# Altium PCB POWER_SUPPLY_PAIRED.PcbDoc
Units mm, origin at the board's own origin, x right, y up, seen from the top; angles counter-clockwise.
Board outline 87 x 207 mm, 2 copper layers (Top Layer, Bottom Layer); 17 components, 12 nets, 50 pads, 0 vias.
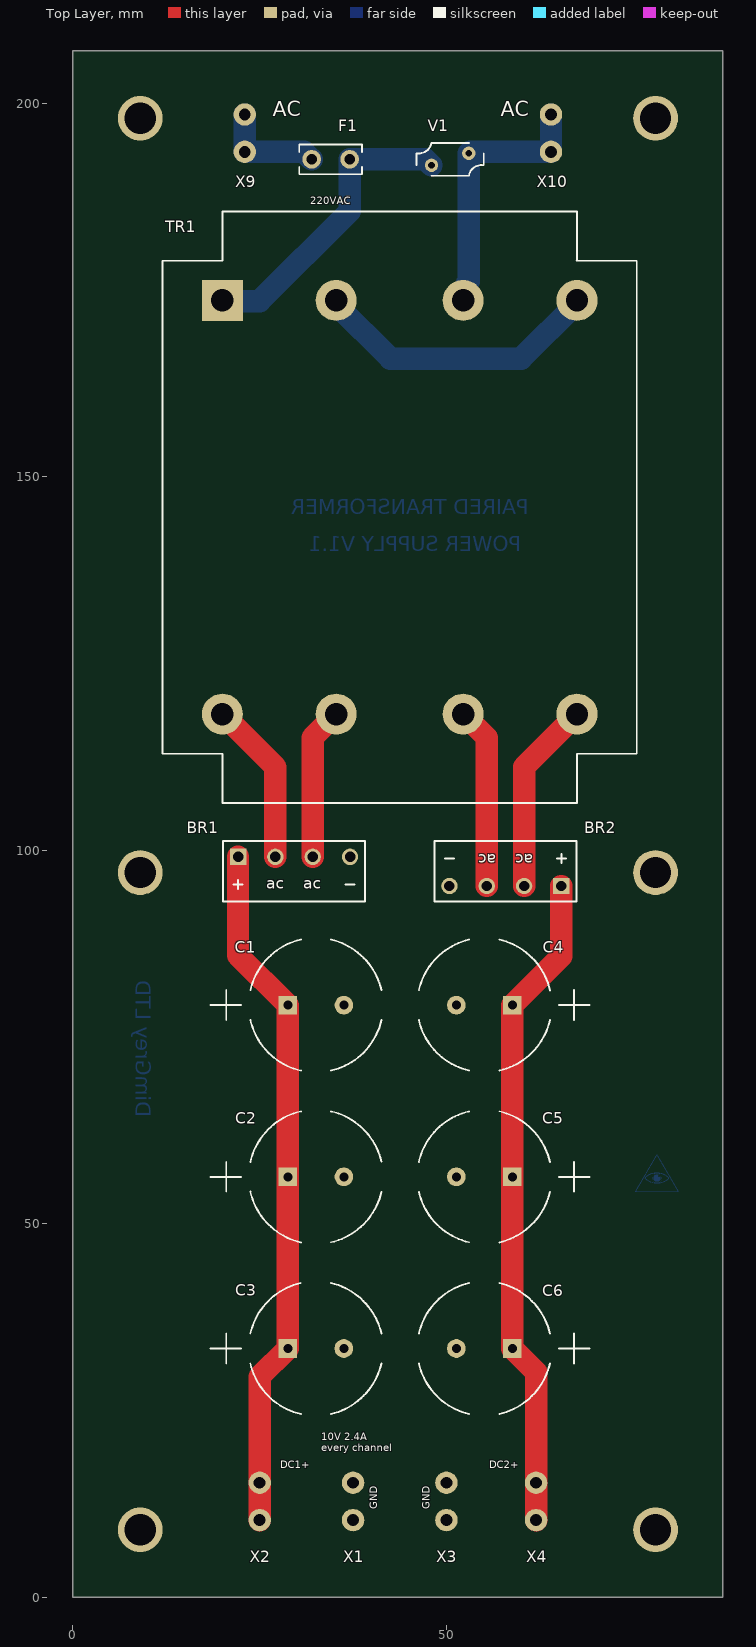
[diagram p0: Top Layer view]
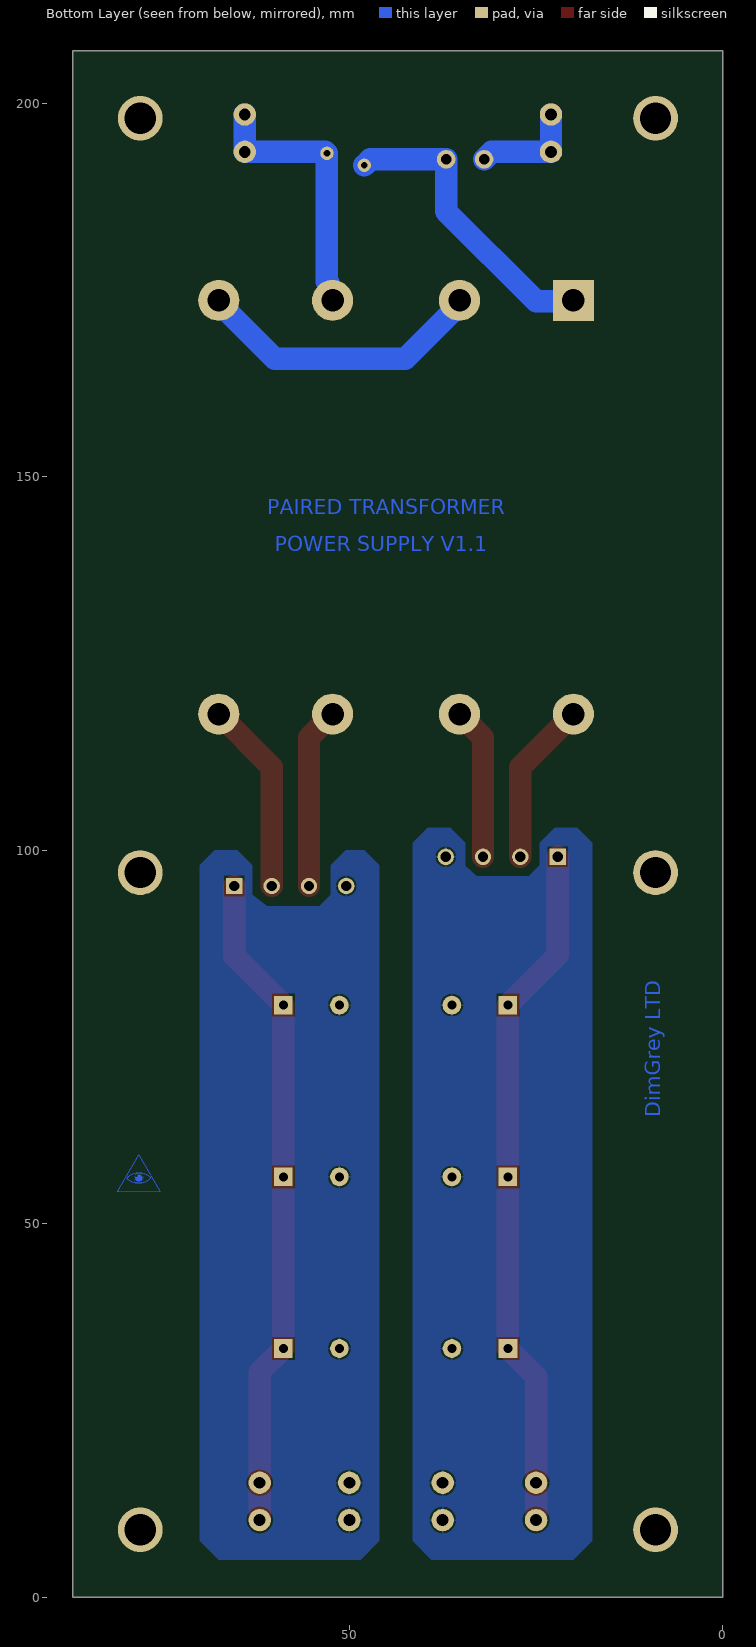
[diagram p1: Bottom Layer view, seen from below]

## Layer stack, top to bottom
Top Solder: solder mask 0.0102, Solder Resist, Dk 3.5
Top Layer: signal copper 0.0356
Dielectric 1: dielectric 0.32, FR-4, Dk 4.8
Bottom Layer: signal copper 0.0356
Bottom Solder: solder mask 0.0102, Solder Resist, Dk 3.5

## Board outline
0,0 87,0 87,207 0,207

## Design rules (kind name [scope] priority, off if disabled: settings)
Clearance [All] p1: gap=0.254 ignorepadtopadclearanceinfootprint=FALSE except(0: Arc-Hole Track-Hole SMDPad-Hole THPad-Hole Via-Hole Fill-Hole Poly-Hole Region-Hole Text-Hole)
PolygonConnect [All] p1: connectstyle=Relief reliefconductorwidth=0.254 reliefentries=4 polygonreliefangle="90 Angle" airgapwidth=0.254
RoutingVias [All] p1: holewidth=0.711 width=1.27 viastyle="Through Hole" minholewidth=0.711 minwidth=1.27 maxholewidth=0.711 maxwidth=1.27
SolderMaskExpansion [All] p1: expansion=0.102 istentingtop=FALSE
Width [All] p1: maxlimit=5 minlimit=2 preferedwidth=3
30 further rules are at their usual default settings.

## Components (designator, comment, footprint, x,y, rotation, side; value= is the part's Value field where it differs from the comment)
BR1 "KBL404G" THT_BRIGDE_KBL404G 29.6,99.1 r0 top
BR2 "KBL404G" THT_BRIGDE_KBL404G 57.9,95.2 r180 top
C1 "4700uF" THT_CAP_EL_SAMXON_EKM478M1HL40RRSAP 32.523,79.248 r0 top
C2 "4700uF" THT_CAP_EL_SAMXON_EKM478M1HL40RRSAP 32.523,56.261 r0 top
C3 "4700uF" THT_CAP_EL_SAMXON_EKM478M1HL40RRSAP 32.516,33.274 r0 top
C4 "4700uF" THT_CAP_EL_SAMXON_EKM478M1HL40RRSAP 55.08,79.248 r180 top
C5 "4700uF" THT_CAP_EL_SAMXON_EKM478M1HL40RRSAP 55.08,56.261 r180 top
C6 "4700uF" THT_CAP_EL_SAMXON_EKM478M1HL40RRSAP 55.08,33.274 r180 top
F1 "200mA" THT_FUSE-MICRO_MTS0200A 34.5,192.5 r0 top
TR1 "FP20-2400" THT_TRFMR_FP20-2400_TRIADMAG 43.74,145.909 r180 top
V1 "B72207S0271K101" THT_VAR_B72207S0271K101 50.5,192.5 r180 top
X1 "GND" THT_TERMINAL-PCB_L-KLS8-01128-PC-250 37.5,12.8 r90 top
X2 "DC1 +" THT_TERMINAL-PCB_L-KLS8-01128-PC-250 25,12.8 r90 top
X3 "GND" THT_TERMINAL-PCB_L-KLS8-01128-PC-250 50,12.8 r90 top
X4 "DC2 +" THT_TERMINAL-PCB_L-KLS8-01128-PC-250 62,12.8 r90 top
X9 "AC1" THT_TERMINAL-PCB_L-KLS8-01128-PC-250 23,196 r90 top
X10 "AC2" THT_TERMINAL-PCB_L-KLS8-01128-PC-250 64,196 r90 top

## Footprints (in the part's own frame and the unit in brackets; to place one, negate y for a bottom-side part, rotate by r counter-clockwise, add the part's x,y. Pads: shape width x height; smd on the part's side, far side on the other; paste and mask are expansions set on the pad)
THT_BRIGDE_KBL404G [mm] "THT Diode Bridge 400V 4A KBL404G TAIWAN SEMICONDUCTOR"
  rect 2.2x2.2 hole 1.4: 1(-7.5,0)
  round 2.2 hole 1.4: 2(-2.5,0) 3(2.5,0) 4(7.493,0)
  silkscreen extent -9.5,-6 9.5,2.1, body extent -9.5,-6 9.5,2.1, height 15.8
THT_CAP_EL_SAMXON_EKM478M1HL40RRSAP [mm] "THT Capacitor Electrolytic 50V 4700uF Pitch 7.5mm SAMXON EKM478M1HL40RRSAP"
  rect 2.5x2.5 hole 1.2: 1(-3.75,0)
  round 2.5 hole 1.2: 2(3.75,0)
  silkscreen extent -14.1,-8.78 8.78,8.77, body extent -9,-9 9,9, height 40
THT_FUSE-MICRO_MTS0200A [mm] "THT Fuse Slow Blow Micro Fuse, 250V/200mA REOMAX"
  round 2.5 hole 1.4: 1(-2.54,0) 2(2.54,0)
  silkscreen extent -4.2,-2 4.2,2, body extent -4.2,-2 4.2,2, height 8.2
THT_TERMINAL-PCB_L-KLS8-01128-PC-250 [mm] "THT Terminal Tab PCB L-KLS8-01128-PC-250 KLS ELECTRONIC"
  round 3 hole 1.6: 1(-2.5,0) 1(2.5,0)
  body extent -4.1,-0.5 4.1,0.5, height 8
THT_TRFMR_FP20-2400_TRIADMAG [mm] "THT Power Transformer 48VA Secondary=2.4A  Primary=230 VAC Secondary=20V FP20-2400 TRIAD MAGNETICS"
  rect 5.5x5.5 hole 3: 1(23.74,-27.7)
  round 5.5 hole 3: 2(8.5,-27.7) 3(-8.5,-27.7) 4(-23.74,-27.7) 5(23.74,27.7) 6(8.5,27.7) 7(-8.5,27.7) 8(-23.74,27.7)
  silkscreen extent -31.75,-39.6 31.75,39.6, body extent -31.75,-39.6 31.75,39.6, height 27
THT_VAR_B72207S0271K101 [mm] "THT Varistor 275V 1200A B72207S0271K101 EPCOS(TDK)"
  round 1.8 hole 0.9: 1(-2.5,-0.8) 2(2.5,0.8)
  silkscreen extent -4.5,-2.2 4.5,2.2, body extent -4.5,-2.2 4.5,2.2, height 9.5

## Part data
BR1 BR2: library part THT_BRIGDE_KBL404G, "THT Diode Bridge 400V 4A KBL404G TAIWAN SEMICONDUCTOR"
C1 C2 C3 C4 C5 C6: library part THT_CAP_EL_SAMXON_EKM478M1HL40RRSAP, "THT Capacitor Electrolytic 50V 4700uF Pitch 7.5mm SAMXON EKM478M1HL40RRSAP"
F1: library part THT_FUSE-MICRO_MTS0200A, "THT Fuse Slow Blow Micro Fuse, 250V/200mA REOMAX"
TR1: library part THT_TRFMR_FP20-2400_TRIADMAG, "THT Power Transformer 48VA Secondary=2.4A  Primary=230 VAC Secondary=20V FP20-2400 TRIAD MAGNETICS"
V1: library part THT_VAR_B72207S0271K101, "THT Varistor 275V 1200A B72207S0271K101 EPCOS(TDK)"
X1 X2 X3 X4 X9 X10: library part THT_TERMINAL-PCB_L-KLS8-01128-PC-250, "THT Terminal Tab PCB L-KLS8-01128-PC-250 KLS ELECTRONIC"

## Free pads (board coordinates)
  round 6 hole 4.2: ""(9,9) ""(9,97) ""(9,198) ""(78,9) ""(78,97) ""(78,198)

## Nets (pads, with @x,y where several pads share a name; then routed paths per layer and width w, separated by ;. In a path a pad name is that pad's centre, name@x,y a point inside that pad or via, vN(x,y) a via of type N, cw(c..) or ccw(c..) an arc to the next point about the centre after c; other vN are vias at no path point)
GND1: BR1.4 C1.2 C2.2 C3.2 X1.1
GND2: BR2.4 C4.2 C5.2 C6.2 X3.1
NetBR1_1: BR1.1 C1.1 C2.1 C3.1 X2.1 | length 93.1
  Top Layer w3: BR1.1 22.1,85.921 C1.1 C2.1 28.77,56.257 28.77,33.278 C3.1 25,29.508 25,15.3 X2.1@25,10.3
NetBR1_2: BR1.2 TR1.5 | length 22
  Top Layer w3: TR1.5 27.1,111.109 BR1.2
NetBR1_3: BR1.3 TR1.6 | length 20.4
  Top Layer w3: BR1.3 32.1,115.069 TR1.6
NetBR2_1: BR2.1 C4.1 C5.1 C6.1 X4.1 | length 88.9
  Top Layer w3: X4.1@62,10.3 62,30.104 C6.1 C5.1 C4.1 65.4,85.818 BR2.1
NetBR2_2: BR2.2 TR1.8 | length 25.9
  Top Layer w3: BR2.2 60.4,111.129 TR1.8
NetBR2_3: BR2.3 TR1.7 | length 24.3
  Top Layer w3: TR1.7 55.4,115.049 BR2.3
NetF1_1: F1.1 X9.1 | length 14.4
  Bottom Layer w3: X9.1@23,198.5 23,193.5 30.96,193.5 F1.1
NetF1_2: F1.2 TR1.1 V1.2 | length 40.3
  Bottom Layer w3: TR1.1 20.109,173.5 25,173.5 37.04,185.54 F1.2 47.2,192.5 V1.2
NetTR1_2: TR1.2 TR1.4 | length 39.2
  Bottom Layer w3: TR1.2 35.24,173.06 42.5,165.8 60,165.8 67.48,173.28 TR1.4
NetTR1_3: TR1.3 V1.1 X10.1 | length 36.1
  Bottom Layer w3: TR1.3 52.718,174.087 52.718,175.855 53,176.137 V1.1 53.2,193.5 64,193.5 X10.1@64,198.5

## Polygon pours and split planes (outlines as drawn)
GND1 on Bottom Layer "GND1_L02_P002" (solid, remove dead copper, pour order 2): 32.944,96.5 26,96.5 24.5,98 24.5,101 22.5,103 19.5,103 17.5,101 17.5,7.5 20,5 39,5 41.5,7.5 41.5,101 39.5,103 36.5,103 34.5,101 34.5,97.9
GND2 on Bottom Layer "GND2_L02_P000" (solid, remove dead copper, pour order 0): 61,92.5 54,92.5 52.5,94 52.5,98 50.5,100 48,100 46,98 46,7.5 48.5,5 67.5,5 70,7.5 70,98 68,100 65,100 63,98 63,94

## Other copper
Bottom Layer:
  region: 78.568,55.834 78.547,55.834 78.547,55.813 78.526,55.813 78.526,55.772 78.506,55.772 78.506,55.751 78.485,55.751 78.485,55.73 78.464,55.73 78.464,55.71 78.423,55.71 78.423,55.689 78.381,55.689 78.381,55.668 78.34,55.668 78.34,55.647 78.049,55.647 78.049,55.668 78.008,55.668 78.008,55.689 77.967,55.689 77.967,55.71 77.925,55.71 77.925,55.73 77.904,55.73 77.904,55.751 77.884,55.751 77.884,55.772 77.863,55.772 77.863,55.793 77.842,55.793 77.842,55.813 77.821,55.813 77.821,55.834 77.801,55.834 77.801,55.876 77.78,55.876 77.78,55.917 77.759,55.917 77.759,56.021 77.738,56.021 77.738,56.145 77.759,56.145 77.759,56.249 77.78,56.249 77.78,56.29 77.801,56.29 77.801,56.332 77.821,56.332 77.821,56.353 77.842,56.353 77.842,56.373 77.863,56.373 77.863,56.394 77.884,56.394 77.884,56.415 77.904,56.415 77.904,56.435 77.925,56.435 77.925,56.456 77.967,56.456 77.967,56.477 77.987,56.477 77.987,56.498 78.049,56.498 78.049,56.518 78.34,56.518 78.34,56.477 78.319,56.477 78.319,56.29 78.34,56.29 78.34,56.27 78.361,56.27 78.361,56.249 78.381,56.249 78.381,56.228 78.402,56.228 78.402,56.207 78.568,56.207 78.568,56.228 78.589,56.228 78.589,56.249 78.609,56.249 78.609,56.207 78.63,56.207 78.63,55.959 78.609,55.959 78.609,55.896 78.589,55.896 78.589,55.855 78.568,55.855
  region: 265 vertices and 3 holes, not listed, extent 76.577,55.378 79.791,56.809
  region: 558 vertices and 1 holes, not listed, extent 75.312,54.237 81.056,59.193
  text "PAIRED TRANSFORMER" at 61,145 h2
  text "POWER SUPPLY V1.1" at 60,140 h2
  text "DimGrey LTD" at 8.4,64.234 h2 r270

## Silkscreen, mask and mechanical layers (free items; w line width, h text height)
Top Overlay:
  text "AC" at 26.754,198.254 h2
  text "AC" at 57.254,198.254 h2
  text "220VAC" at 31.749,186.5 h1
  text "10V 2.4A / every channel" at 33.249,19.5 h1
  text "DC1+" at 27.754,17.254 h1
  text "DC2+" at 55.754,17.254 h1
  text "GND" at 40.746,11.754 h1 r90
  text "GND" at 47.746,11.754 h1 r90

## Text inside footprints (layer, text, board x,y; h text height)
BR1: Top Overlay "ac" at 25.854,94.854 h1.5; Top Overlay "ac" at 30.854,94.854 h1.5
BR2: Top Overlay "ac" at 61.646,99.446 h1.5 r180; Top Overlay "ac" at 56.646,99.446 h1.5 r180